# EAGLE board PeakShaver (EAGLE 9.5.0)
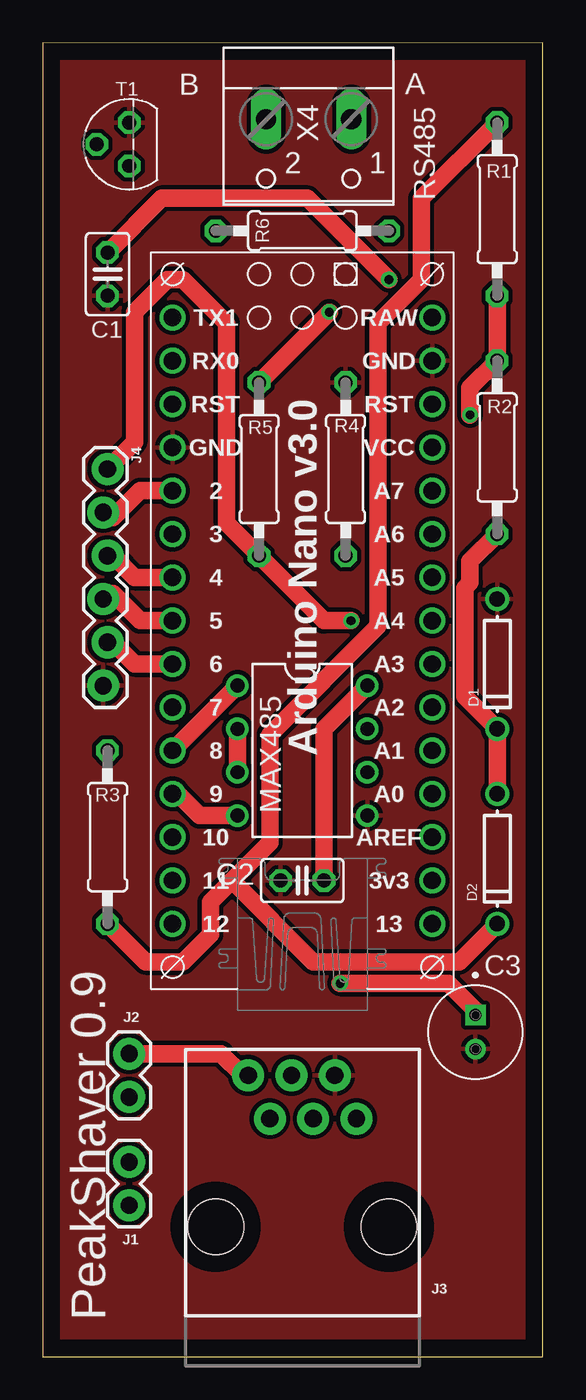
[diagram p0: board, top side]
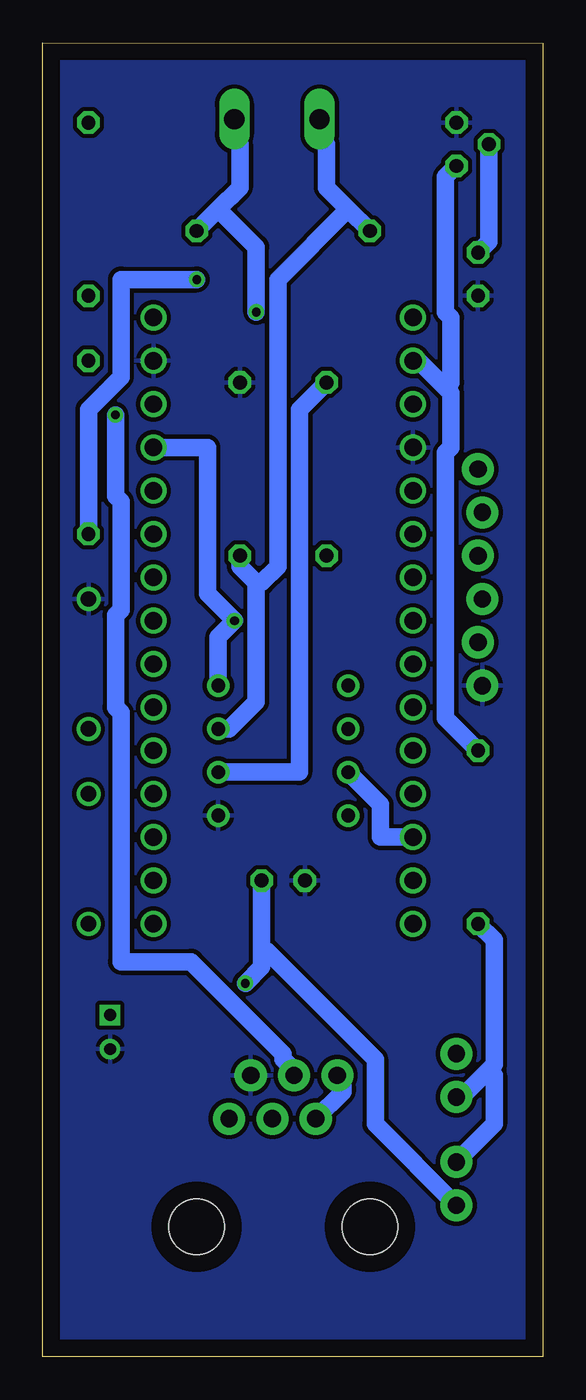
[diagram p1: board, bottom side, seen from below]

Size 29.36 x 77.08 mm. Coordinates in mm from the lower left corner, seen from the top.
Outline: 0,0 29.36,0 29.36,77.08 0,77.05 0,0
Copper layers (1*16): Top 0.035mm / dielectric 1.5mm / Bottom 0.035mm
Design rules "default": minimum track width 6mil, minimum drill 0.35mm, track to track 6mil, track to pad 6mil, pad to pad 6mil, via to via 6mil, smd to smd 6mil, copper to edge 40mil, drill to drill 6mil, minimum pad ring 10mil, minimum via ring 8mil, stop-mask expansion 4mil, vias tented up to drill 0mil, thermal gap 10mil
Net classes: 0 default: width 1.016 mm, drill 0.508 mm, clearance 0.254 mm; 1 GND: width 1.016 mm, drill 0.508 mm, clearance 0.254 mm; 4 PWR: width 1.016 mm, drill 0.508 mm, clearance 0.254 mm to class 2, clearance 0.254 mm

## Footprints (pad centres in the part's own frame; a part is rotated, then mirrored left to right if it is on the bottom)
NANOV3 = drill 1.016: 2 -7.62,5.08; 3 -7.62,2.54; 3V3 7.62,-17.78; 4 -7.62,0; 5 -7.62,-2.54; 6 -7.62,-5.08; 7 -7.62,-7.62; 8 -7.62,-10.16; 9 -7.62,-12.7; 10 -7.62,-15.24; 11 -7.62,-17.78; 12 -7.62,-20.32; 13 7.62,-20.32; A0 7.62,-12.7; A1 7.62,-10.16; A2 7.62,-7.62; A3 7.62,-5.08; A4 7.62,-2.54; A5 7.62,0; A6 7.62,2.54; A7 7.62,5.08; AREF 7.62,-15.24; GND -7.62,7.62; GND2 7.62,12.7; RAW 7.62,15.24; RST -7.62,10.16; RST2 7.62,10.16; RX0 -7.62,12.7; TX1 -7.62,15.24; VCC 7.62,7.62
C025-025X050 = drill 0.813 octagon: 1 -1.27,0; 2 1.27,0
CAP_RADIAL_2MM = drill 0.7 pad 1.1 square: 1 -1,0 | drill 0.7 pad 1.1: 2 1,0
DO-1N4148 = drill 0.9: A -3.81,0; C 3.81,0
1X02 = drill 1.016 pad 1.88: 1 0,0; 2 2.54,0
RJ11-6 = drill 1.016 pad 1.88: 1 -3.175,8.89; 2 -1.905,6.35; 3 -0.635,8.89; 4 0.635,6.35; 5 1.905,8.89; 6 3.175,6.35 | hole 3.251: -5.08,0; 5.08,0
1X06_LOCK = drill 1.016 pad 1.88: 1 0,0; 2 2.54,-0.254; 3 5.08,0; 4 7.62,-0.254; 5 10.16,0; 6 12.7,-0.254
TEXAS_DIL08 = drill 0.813 pad 1.27: 1 -3.81,-3.81; 2 -1.27,-3.81; 3 1.27,-3.81; 4 3.81,-3.81; 5 3.81,3.81; 6 1.27,3.81; 7 -1.27,3.81; 8 -3.81,3.81
0207/10 = drill 0.813 octagon: 1 -5.08,0; 2 5.08,0
TO92 = drill 0.813 octagon: 1 1.27,0; 2 0,1.905; 3 -1.27,0
W237-102 = drill 1.194 long: 1 -2.5,-1.27; 2 2.5,-1.27

## Placement (x,y rotation side)
ARDUINO  NANOV3  [NANOV3]  15.24,45.72 0 top
C1  1nF  [C025-025X050]  3.81,63.5 270 top
C2  0.1uF  [C025-025X050]  15.24,27.94 180 top
C3  10uF  [CAP_RADIAL_2MM]  25.4,19.05 270 top
D1  1N4148  [DO-1N4148]  26.67,40.64 270 top
D2  1N4148  [DO-1N4148]  26.67,29.21 270 top
J1  A5V  [1X02]  5.08,8.89 90 top
J2  SM5V  [1X02]  5.08,15.24 90 top
J3  RJ11  [RJ11-6]  15.24,7.62 0 top
J4  RGB Button  [1X06_LOCK]  3.81,52.07 270 top
MAX485  SPARKFUN-IC-COMMS_RS485  [TEXAS_DIL08]  15.24,35.56 270 top
R1  10k  [0207/10]  26.67,67.31 90 top
R2  1k  [0207/10]  26.67,53.34 90 top
R3  10k  [0207/10]  3.81,30.48 270 top
R4  20k  [0207/10]  17.78,52.07 90 top
R5  20k  [0207/10]  12.7,52.07 270 top
R6  120  [0207/10]  15.24,66.04 180 top
T1  BC547  [TO92]  5.08,71.12 90 top
X4  RS485  [W237-102]  15.61,71.32 180 top

## Library data of the parts
ARDUINO = Arduino Nano by Jazz
C1 C2 = BeagleBone_Black_Wireless
C3 = Resistor_Capacitor; CREATED_BY: PCBLayout.com; DIGIKEY_PART_NUMBER: P5178-ND; MANUFACTURER: Panasonic Electronic Components; MPN: ECA-1HM100; PACKAGE: CAP RADIAL 2MM LS
D1 D2 = adafruit
J1 J2 J4 = SparkFun-Connectors
J3 = SparkFun-Connectors; PROD_ID: CONN-08590; SF_ID: PRT-00132
MAX485 = evse_nano
R1-R6 = resistor
T1 = transistor-neu-to92
X4 = con-wago-500; MPN: 237-102; OC_FARNELL: unknown; OC_NEWARK: 70K9898; P1: A; P2: B

## Nets
+5V [PWR]: ARDUINO.VCC C2.1 C3.1 J1.1 J4.1 MAX485.8 R5.2
A: MAX485.6 R5.1 R6.1 X4.1
B: MAX485.7 R4.1 R6.2 X4.2
BASE [PWR]: C1.1 D1.C D2.A R2.1 T1.2
BLUE: ARDUINO.6 J4.5
BTN: ARDUINO.2 J4.2
D [PWR]: J3.3 R1.1 R2.2
DI: ARDUINO.9 MAX485.4
DIR: ARDUINO.10 MAX485.2 MAX485.3
GND [GND]: ARDUINO.GND ARDUINO.GND2 C1.2 C2.2 C3.2 D1.A J3.5 J4.6 MAX485.5 R4.2 T1.1
GREEN: ARDUINO.5 J4.4
N$1 [PWR]: D2.C J1.2 J2.1 R1.2 R3.2
RED: ARDUINO.4 J4.3
RO: ARDUINO.8 MAX485.1
RTS [PWR]: J2.2 J3.1 J3.2
RX: ARDUINO.RX0 R3.1 T1.3

## Tracks (layer width: path | path; a pad name or v marks a point on that pad's centre or on a via)
+5V  (via drill 0.51)
  Top 1.016: v17.46,21.91 23.81,21.91 25.4,20.32 C3.1 | v18.1,43.18 16.51,43.18 R5.2 10.8,48.9 10.8,60.64 8.26,63.18 7.3,63.18 5.4,61.28 5.4,53.66 J4.1 | C2.1 16.51,36.83 MAX485.8
  Bottom 1.016: v17.46,21.91 16.51,22.86 16.51,23.81 | C2.1 16.51,23.81 | J1.1 9.84,13.65 9.84,17.46 16.19,23.81 16.51,23.81 | MAX485.8 19.05,42.23 v18.1,43.18 19.69,44.77 19.69,53.34 ARDUINO.VCC
A  (via drill 0.51)
  Top 1.016: R5.1 v16.83,61.28
  Bottom 1.016: 19.05,67.31 17.78,68.58 17.78,71.12 18.1,71.44 18.1,72.39 X4.1 | 19.05,67.31 R6.1 | MAX485.6 14.29,34.29 14.29,55.56 R5.1 | 19.05,67.31 16.83,65.09 v16.83,61.28
B
  Bottom 1.016: 11.43,67.31 12.7,68.58 12.7,71.12 13.02,71.44 13.02,72.39 X4.2 | 11.43,67.31 R6.2 | MAX485.7 18.41,36.83 16.83,38.42 16.83,45.4 | 16.83,45.4 17.78,46.36 R4.1 | 11.43,67.31 15.56,63.18 15.56,46.36 16.51,45.4 16.83,45.4
BASE  (via drill 0.51)
  Top 1.016: R2.1 25.08,46.67 25.08,45.4 24.77,45.09 24.77,38.74 D1.C D2.A | C1.1 6.98,67.94 15.56,67.94 v20.32,63.18
  Bottom 1.016: C1.1 3.18,65.41 T1.2 | v20.32,63.18 24.77,63.18 24.77,57.47 26.67,55.56 R2.1
BLUE
  Top 1.016: ARDUINO.6 5.4,40.64 4.13,41.91 J4.5
BTN
  Top 1.016: ARDUINO.2 5.72,50.8 4.13,49.21 3.81,49.21 3.49,49.53 J4.2
D  (via drill 0.51)
  Top 1.016: R1.1 R2.2 25.08,56.83 v25.08,55.25
  Bottom 1.016: J3.3 14.92,16.83 14.92,17.14 15.24,17.46 15.24,17.78 20.64,23.18 24.77,23.18 24.77,37.78 25.08,38.1 25.08,43.5 24.77,43.82 24.77,50.17 25.08,50.48 v25.08,55.25
DI
  Top 1.016: MAX485.4 9.21,31.75 7.94,33.02 ARDUINO.9
DIR
  Top 1.016: MAX485.2 MAX485.3
  Bottom 1.016: ARDUINO.10 9.53,30.48 9.53,32.38 MAX485.3
GND
  pour Top: -5.08,-3.83 -5.08,78.74 36.83,78.74 36.83,-3.86
  pour Bottom: -4.21,79.67 34.6,79.7 34.6,-1.44 -3.15,-1.44
GREEN
  Top 1.016: ARDUINO.5 5.72,43.18 4.13,44.77 3.81,44.77 3.49,44.45 J4.4
N$1
  Top 1.016: R1.2 22.23,67.94 22.23,63.18 19.69,60.64 19.69,42.86 13.34,36.51 13.34,30.16 11.11,27.94 | 11.11,27.94 9.84,26.67 9.84,24.77 8.26,23.18 6.03,23.18 R3.2 | D2.C 24.45,23.18 15.88,23.18 11.11,27.94
  Bottom 1.016: R3.2 2.86,24.45 2.86,17.14 3.18,16.83 | 3.18,16.83 4.76,15.24 J2.1 | J1.2 2.86,13.65 2.86,16.51 3.18,16.83
RED
  Top 1.016: ARDUINO.4 5.4,45.72 4.13,46.99 J4.3
RO
  Top 1.016: ARDUINO.8 MAX485.1
RTS
  Top 1.016: J2.2 10.48,17.78 11.75,16.51 J3.1
  Bottom 1.016: J3.2 11.75,15.56 11.75,15.88 12.07,16.19 J3.1
RX
  Bottom 1.016: R3.1 5.72,37.47 5.72,53.02 5.4,53.34 5.4,56.52 5.72,56.83 | 5.72,56.83 7.3,58.42 ARDUINO.RX0 | T1.3 5.72,69.21 5.72,61.28 5.4,60.96 5.4,57.15 5.72,56.83

## Text on the board
tNames: PeakShaver 0.9
bValues: www.github.com/ajvdw